# Altium PCB SteppperController.PcbDoc
Units mil, origin at the board's own origin, x right, y up, seen from the top; angles counter-clockwise.
Board outline 1653.54 x 1653.54 mil, 2 copper layers (Top Layer, Bottom Layer); 26 components, 24 nets, 90 pads, 34 vias.
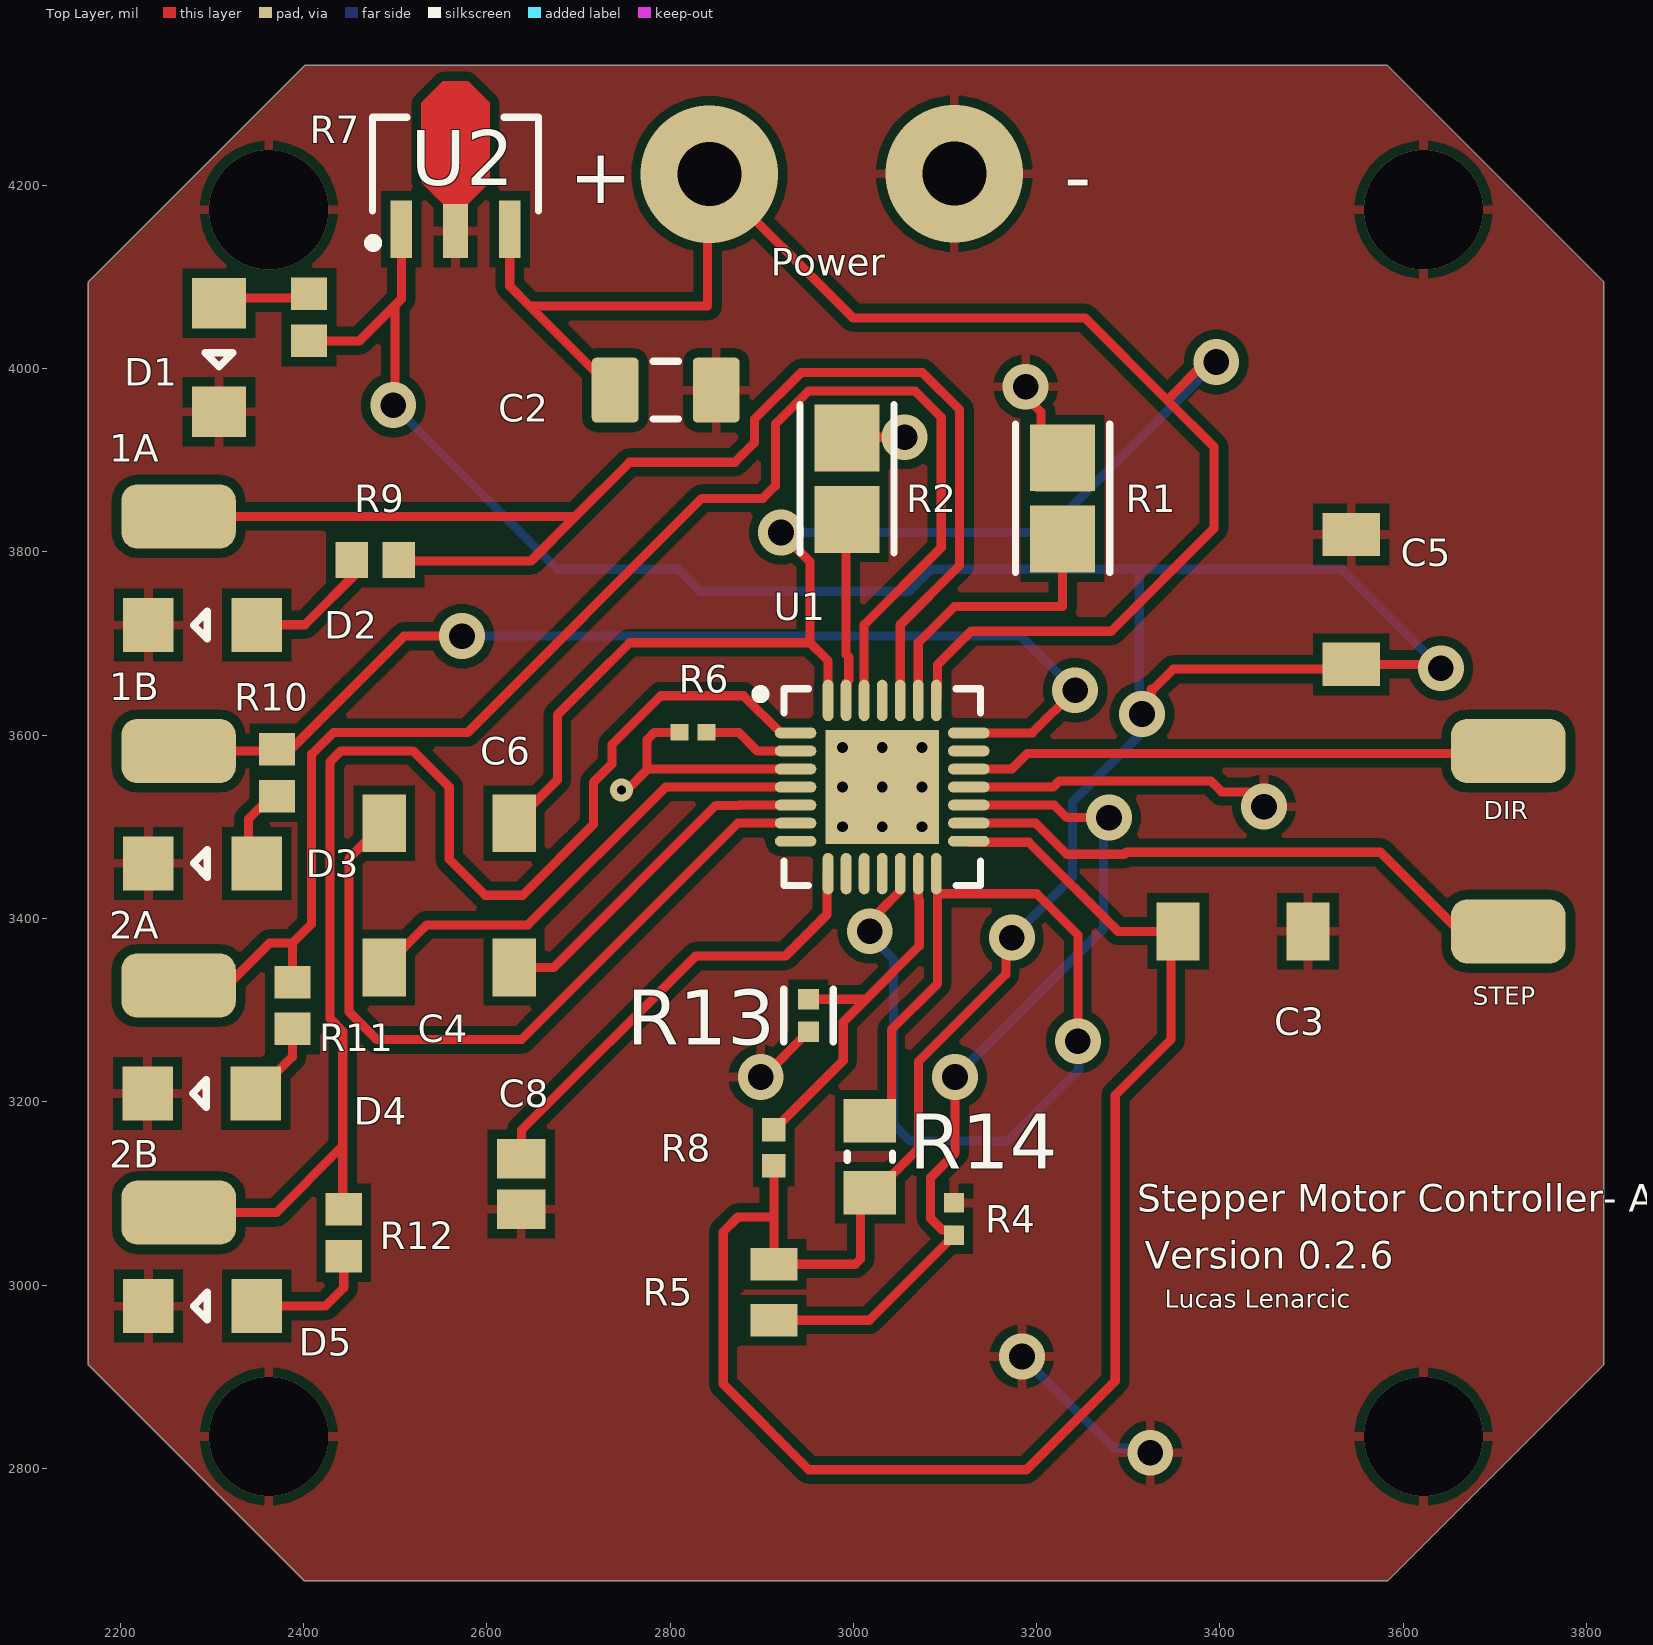
[diagram p0: Top Layer view]
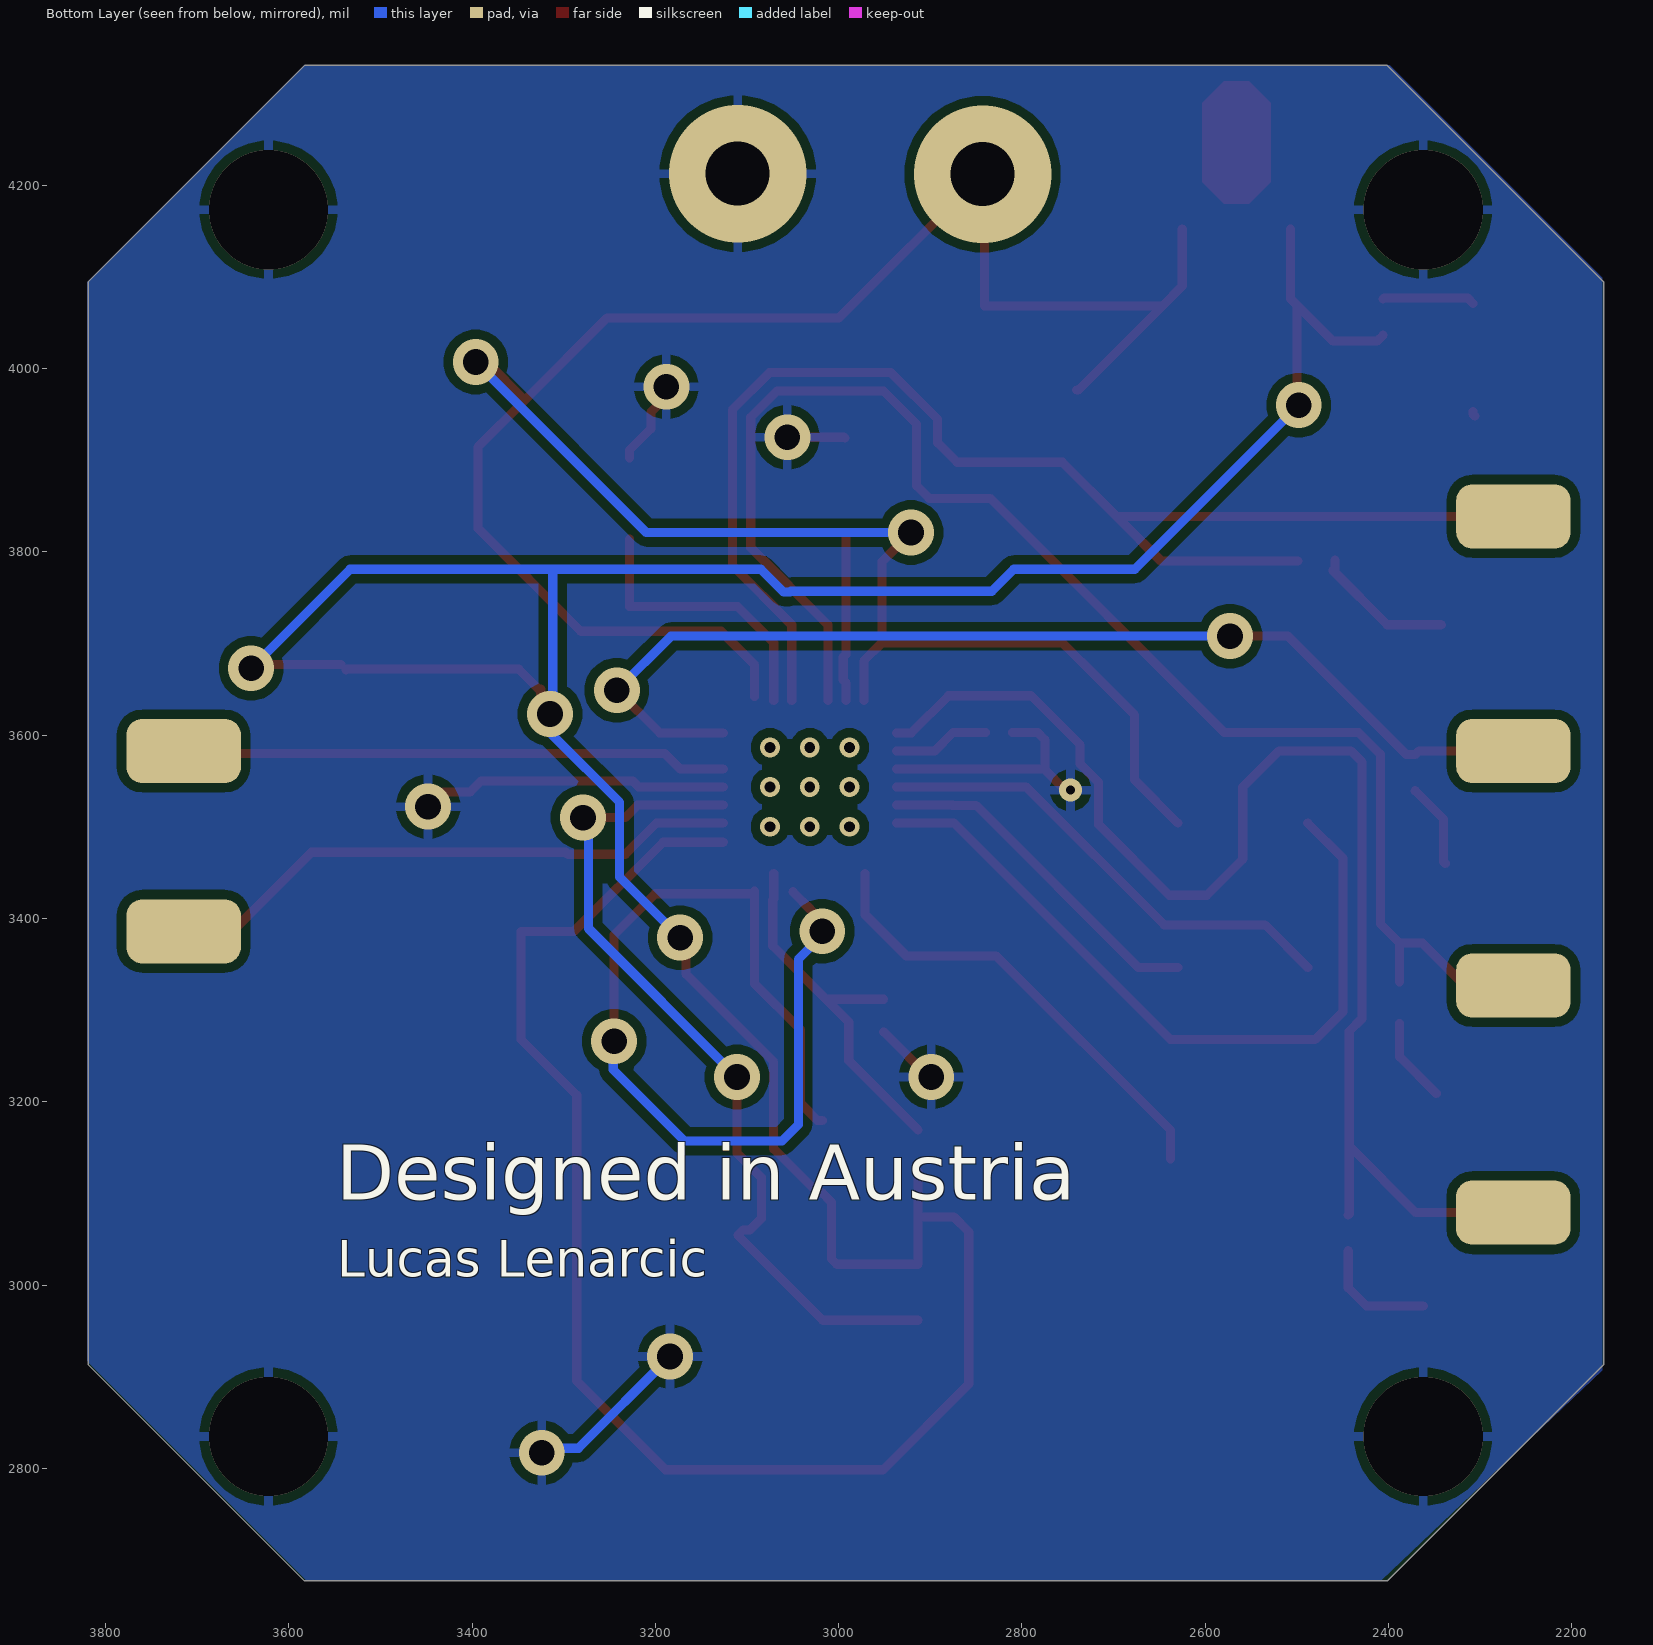
[diagram p1: Bottom Layer view, seen from below]
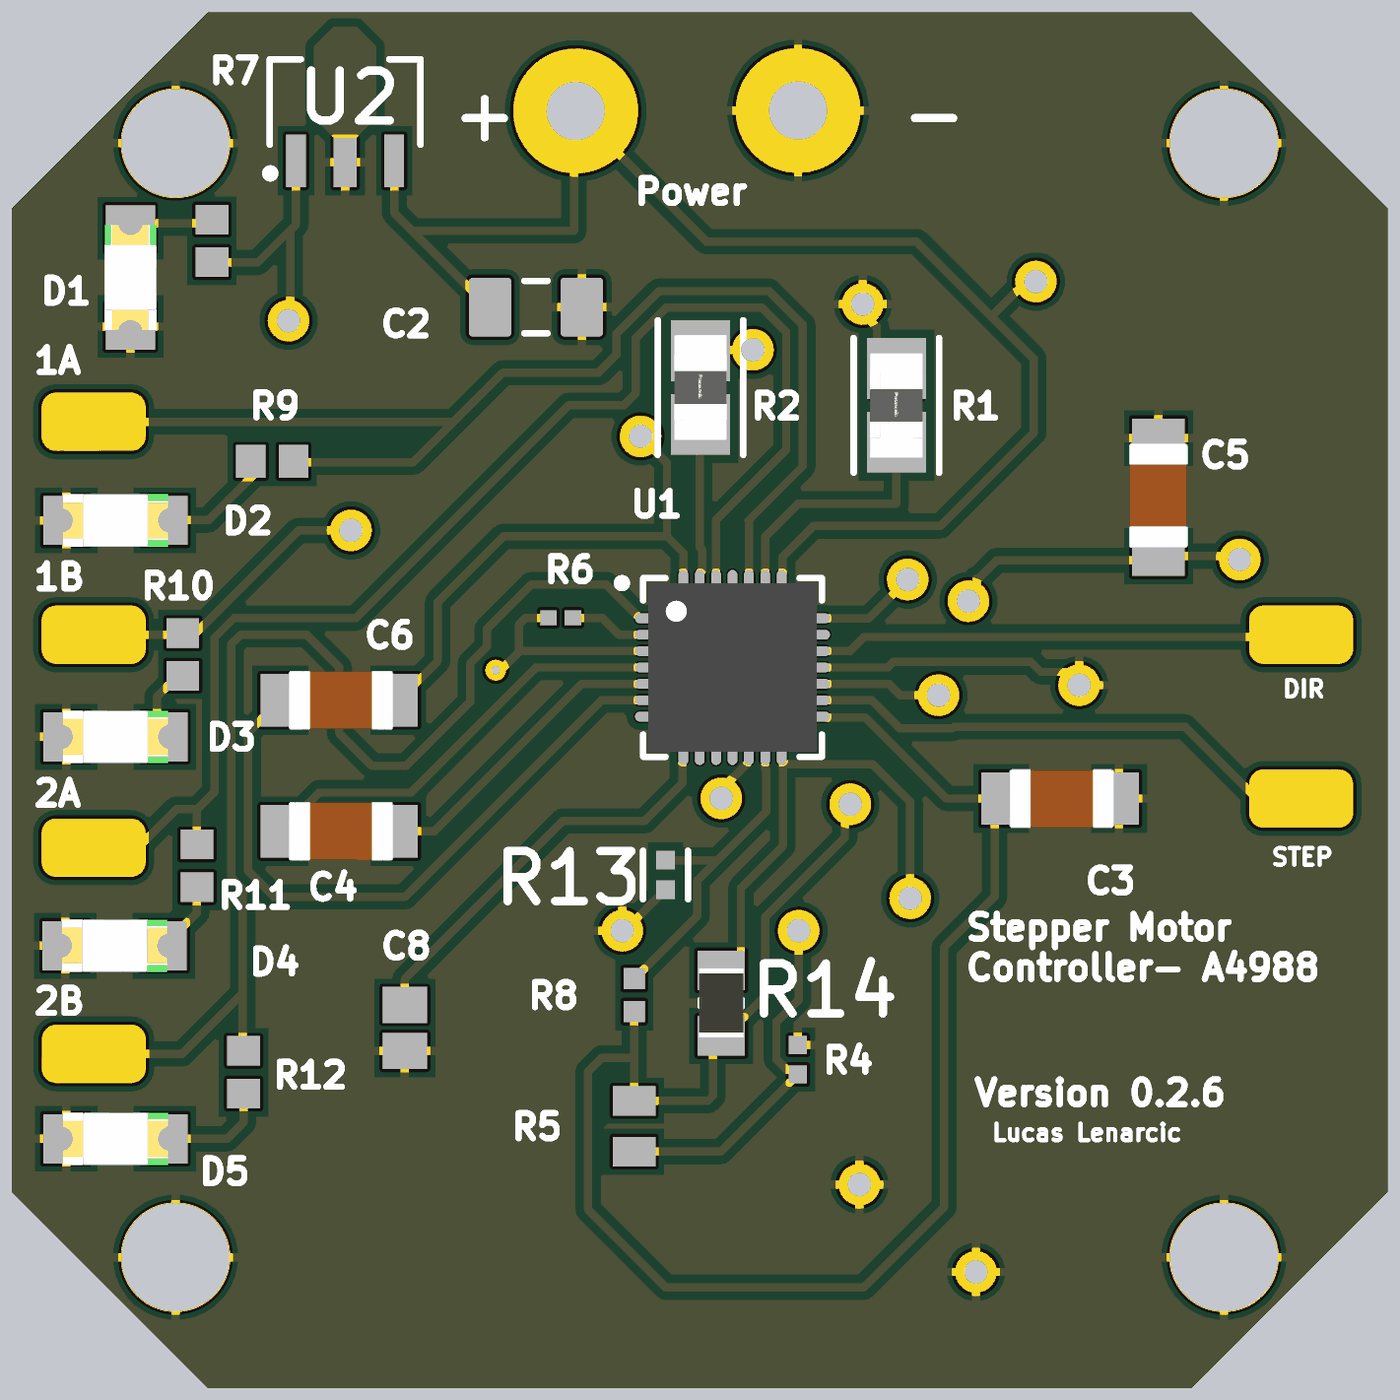
[diagram p2: 3D render of the assembled board from above, using the file's embedded part models]

## Layer stack, top to bottom
Top Solder: solder mask 0.4, Solder Resist, Dk 3.5
Top Layer: signal copper 1.4
Dielectric 1: dielectric 12.6, FR-4, Dk 4.8
Bottom Layer: signal copper 1.4
Bottom Solder: solder mask 0.4, Solder Resist, Dk 3.5

## Board outline
2401.57,4330.71 3582.68,4330.71 3818.9,4094.49 3818.9,2913.39 3582.68,2677.17 2401.57,2677.17 2165.35,2913.39 2165.35,4094.49

## Design rules (kind name [scope] priority, off if disabled: settings)
AssemblyTestPointUsage AssemblyTestPointUsage_1 [All] p2:
AssemblyTestpoint AssemblyTestpoint_1 [All] p2: testpointundercomponent=TRUE minsize=40 maxsize=100 preferedsize=60 minholesize=0 maxholesize=40 preferedholesize=32 testpointgrid=1 usegrid=TRUE gridtolerance=0.01 allowsidetop=TRUE allowsidebottom=TRUE
Clearance [All] p1: gap=10 ignorepadtopadclearanceinfootprint=FALSE except(0: Arc-Hole Track-Hole SMDPad-Hole THPad-Hole Via-Hole Fill-Hole Poly-Hole Region-Hole Text-Hole)
Clearance Clearance_1 [All] p2: gap=10 ignorepadtopadclearanceinfootprint=FALSE except(0: Arc-Hole Track-Hole SMDPad-Hole THPad-Hole Via-Hole Fill-Hole Poly-Hole Region-Hole Text-Hole)
ComponentClearance ComponentClearance_1 [All] p2: gap=10 collisioncheckmode=3 verticalgap=10 showdistances=FALSE
DiffPairsRouting DiffPairsRouting_1 [All] p2: maxlimit=10 minlimit=10 mostfreqgap=10 toplayer_minwidth=15 toplayer_maxwidth=15 toplayer_prefwidth=15 bottomlayer_minwidth=15 bottomlayer_maxwidth=15 bottomlayer_prefwidth=15 maxuncoupledlength=500
FabricationTestPointUsage FabricationTestPointUsage_1 [All] p2: valid=0 allowmultiple=FALSE
FabricationTestpoint FabricationTestpoint_1 [All] p2: side=3 testpointundercomponent=TRUE minsize=40 maxsize=100 preferedsize=60 minholesize=0 maxholesize=40 preferedholesize=32 testpointgrid=1 allowsidetop=TRUE allowsidebottom=TRUE usegrid=TRUE gridtolerance=0.01
FanoutControl Fanout_LCC [IsLCC] p1: bgadir=Out bgaviamode=Centered fanoutstyle=Auto fanoutdirection=Alternating viagrid=1 // Fanout_LCC (Default Rule)
FanoutControl Fanout_BGA [IsBGA] p2: bgadir=Out bgaviamode=Centered fanoutstyle=Auto fanoutdirection=Alternating viagrid=1 // Fanout_BGA (Default Rule)
FanoutControl Fanout_Default [All] p4: bgadir=Out bgaviamode=Centered fanoutstyle=Auto fanoutdirection=Alternating viagrid=1 // Fanout_Default (Default Rule)
FanoutControl Fanout_Small [(CompPinCount < 5)] p5: bgadir=Out bgaviamode=Centered fanoutstyle=Auto fanoutdirection=OutThenIn viagrid=1 // Fanout_Small (Default Rule)
FanoutControl Fanout_BGA_1 [IsBGA] p6: bgadir=Out bgaviamode=Centered fanoutstyle=Auto fanoutdirection=Alternating viagrid=1 // Fanout_BGA (Default Rule)
FanoutControl Fanout_LCC_1 [IsLCC] p7: bgadir=Out bgaviamode=Centered fanoutstyle=Auto fanoutdirection=Alternating viagrid=1 // Fanout_LCC (Default Rule)
FanoutControl Fanout_SOIC_1 [IsSOIC] p8: bgadir=Out bgaviamode=Centered fanoutstyle=Auto fanoutdirection=Alternating viagrid=1 // Fanout_SOIC (Default Rule)
FanoutControl Fanout_Small_1 [(CompPinCount < 5)] p9: bgadir=Out bgaviamode=Centered fanoutstyle=Auto fanoutdirection=OutThenIn viagrid=1 // Fanout_Small (Default Rule)
FanoutControl Fanout_Default_1 [All] p10: bgadir=Out bgaviamode=Centered fanoutstyle=Auto fanoutdirection=Alternating viagrid=1 // Fanout_Default (Default Rule)
Height Height_1 [All] p2: minheight=0 maxheight=1000 prefheight=500
HoleSize HoleSize_1 [All] p2: absolutevalues=TRUE maxlimit=100 minlimit=1 maxpercent=80.000 minpercent=20.000
HoleToHoleClearance HoleToHoleClearance_1 [All] p2: gap=10 allowstackedmicrovias=TRUE
LayerPairs LayerPairs_1 [All] p2: enforce=TRUE
MinimumSolderMaskSliver MinimumSolderMaskSliver_1 [All] p2: minsoldermaskwidth=10
NetAntennae NetAntennae_1 [All] p2: netantennaetolerance=0
PasteMaskExpansion PasteMaskExpansion_1 [All] p2: expansion=0
PlaneClearance PlaneClearance_1 [All] p2: clearance=20
PlaneConnect PlaneConnect_1 [All] p2: planeconnectstyle=Relief reliefexpansion=20 reliefentries=4 reliefconductorwidth=10 reliefairgap=10
PolygonConnect [All] p1: connectstyle=Relief reliefconductorwidth=10 reliefentries=4 polygonreliefangle="90 Angle" airgapwidth=10
PolygonConnect PolygonConnect_1 [All] p2: connectstyle=Relief reliefconductorwidth=10 reliefentries=4 polygonreliefangle="90 Angle" airgapwidth=10
RoutingCorners RoutingCorners_1 [All] p2: cornerstyle=45-Degree minsetback=100 maxsetback=100
RoutingLayers RoutingLayers_1 [All] p2: top layer_v5=TRUE bottom layer_v5=TRUE
RoutingPriority RoutingPriority_1 [All] p2: routingpriority=0
RoutingTopology RoutingTopology_1 [All] p2: topology=Shortest
RoutingVias [All] p1: holewidth=28 width=50 viastyle="Through Hole" minholewidth=28 minwidth=50 maxholewidth=28 maxwidth=50
RoutingVias RoutingVias_1 [All] p2: holewidth=28 width=50 viastyle="Through Hole" minholewidth=28 minwidth=50 maxholewidth=28 maxwidth=50
ShortCircuit ShortCircuit_1 [All] p2: allowed=FALSE
SilkToBoardRegionClearance SilkToBoardRegionClearance_1 [All] p2:
SilkToSilkClearance SilkToSilkClearance_1 [All] p2: silktosilkclearance=10
SilkToSolderMaskClearance SilkToSolderMaskClearance_1 [IsPad] p2: minsilkscreentomaskgap=10 clearancetoexposedcopper=TRUE
SolderMaskExpansion [All] p1: expansion=4 istentingtop=FALSE
SolderMaskExpansion SolderMaskExpansion_1 [All] p2: expansion=4 istentingtop=FALSE
UnRoutedNet UnRoutedNet_1 [All] p2:
UnpouredPolygon UnpouredPolygon_1 [All] p2:
Width [All] p1: maxlimit=10 minlimit=10 preferedwidth=10
Width Width_1 [All] p2: maxlimit=10 minlimit=10 preferedwidth=10
26 further rules are at their usual default settings.

## Components (designator, comment, footprint, x,y, rotation, side; value= is the part's Value field where it differs from the comment)
C2 "0.33uF" PCB-w610zufupuummbghd1in-1 2795.28,3976.38 r180 top
C3 "0.1uF" PCB-lcc7kuvv5qjd2xw4yurg-1 3425.2,3385.83 r180 top
C4 "0,1uF" PCB-lcc7kuvv5qjd2xw4yurg-1 2559.06,3346.46 r180 top
C5 "0.1uF" PCB-lcc7kuvv5qjd2xw4yurg-1 3543.31,3748.03 r270 top
C6 "0.1uF" PCB-lcc7kuvv5qjd2xw4yurg-1 2559.06,3503.94 r180 top
C8 "0.22uF" CAPC2013X140X50LL20T25 2637.8,3110.24 r90 top
D1 "Dialight 598-8210-107F" PCB-nfeeyiqhjphw6gveeqew-1 2308,4012 r270 top
D2 "Dialight 598-8210-107F" PCB-nfeeyiqhjphw6gveeqew-1 2290,3720 r180 top
D3 "Dialight 598-8210-107F" PCB-nfeeyiqhjphw6gveeqew-1 2290,3460 r180 top
D4 "Dialight 598-8210-107F" PCB-nfeeyiqhjphw6gveeqew-1 2289,3209 r180 top
D5 "Dialight 598-8210-107F" PCB-nfeeyiqhjphw6gveeqew-1 2290,2977 r180 top
R1 "ERJ8CWFR050V" FP-ERJ8CW-IPC_B 3228.35,3858.27 r270 top
R2 "ERJ8CWFR050V" FP-ERJ8CW-IPC_B 2993,3879.68 r270 top
R4 "ERJ-2RKF2401X" RESC1005X40X25NL05T05 3110,3072 r270 top
R5 "20k" RESC2013X55X40LL15T20 2913.39,2992.13 r90 top
R6 "100K" PCB-n97kkldbbf5rklmnt71m-1 2825,3603 r0 top
R7 "2.2k" RESC1608X55X30NL20T20 2406,4056 r270 top
R8 "1Ohm No short circuit" RESC1005X40X25ML05T05 2913.39,3149.61 r270 top
R9 "2.2k" RESC1608X55X30NL20T20 2478.31,3791 r0 top
R10 "2.2k" RESC1608X55X30NL20T20 2371,3559 r90 top
R11 "2.2k" RESC1608X55X30NL20T20 2388,3305 r90 top
R12 "2.2k" RESC1608X55X30NL20T20 2444,3057 r90 top
R13 "10k" FP-CRCW0402-e3-IPC_B 2951,3294 r90 top
R14 "100kOhm" RESC2013X60X35ML10T20 3018,3140 r270 top
U1 "A4988" ALEG-ET-28_V 3031.5,3543.31 r0 top
U2 "onsemi MC78L05ACHT1G" NXP-SOT89_A_M 2566,4217 r90 top

## Footprints (in the part's own frame and the unit in brackets; to place one, negate y for a bottom-side part, rotate by r counter-clockwise, add the part's x,y. Pads: shape width x height; smd on the part's side, far side on the other; paste and mask are expansions set on the pad)
ALEG-ET-28_V [mm] "QFN, 28-Leads, Body 5.15x5.15mm, Pitch 0.5mm, Thermal Pad 3.15x3.15mm"
  oval 1.15x0.3 smd mask+0.051: 1(-2.4,1.5) 2(-2.4,1) 3(-2.4,0.5) 4(-2.4,0) 5(-2.4,-0.5) 6(-2.4,-1) 7(-2.4,-1.5) 15(2.4,-1.5) 16(2.4,-1) 17(2.4,-0.5) 18(2.4,0) 19(2.4,0.5) 20(2.4,1) 21(2.4,1.5)
  oval 0.3x1.15 smd mask+0.051: 8(-1.5,-2.4) 9(-1,-2.4) 10(-0.5,-2.4) 11(0,-2.4) 12(0.5,-2.4) 13(1,-2.4) 14(1.5,-2.4) 22(1.5,2.4) 23(1,2.4) 24(0.5,2.4) 25(0,2.4) 26(-0.5,2.4) 27(-1,2.4) 28(-1.5,2.4)
  rect 3.15x3.15 smd mask+0.051: 29(0,0)
  silkscreen extent -3.5,-2.73 2.73,2.73, body extent -2.58,-2.58 2.58,2.58, height 1
CAPC2013X140X50LL20T25 [mm] "CAPC2013X140X50LL20T25"
  rect 1.1x1.35 smd: 1(-0.7,0) 2(0.7,0)
  body extent -1.1,-0.72 1.1,0.72, height 1.4
FP-CRCW0402-e3-IPC_B [mil]
  rect 22.37x22.54 smd paste+0 mask+0: 1(-17.8,0) 2(17.8,0)
  silkscreen extent -29,-27 29,27
FP-ERJ8CW-IPC_B [mil]
  rect 73.03x71.11 smd paste+0 mask+0: 1(-44.32,0) 2(44.32,0)
  silkscreen extent -81,-51 81,51, body extent -91,-45 91,45, height 10
NXP-SOT89_A_M [mm] "SOT89, 3-Leads, Body 4.6x2.6mm, Pitch 1.5mm, IPC Low Density"
  rect 1.6x0.6 smd: 1(-1.65,1.5) 3(-1.65,-1.5)
  rect 1.5x0.7 smd: 2(-1.7,0)
  Top Layer region: -0.95,0.35 -0.35,0.95 1.85,0.95 2.45,0.35 2.45,-0.35 1.85,-0.95 -0.35,-0.95 -0.95,-0.35
  silkscreen extent -2.16,-2.3 1.45,2.41, body extent -1.15,-2.3 1.45,2.3, height 1.6
PCB-lcc7kuvv5qjd2xw4yurg-1 [mm]
  rect 1.2x1.6 smd: 1(-1.8,0) 2(1.8,0)
  body extent -1.65,-0.9 1.55,0.9, height 1.55
PCB-n97kkldbbf5rklmnt71m-1 [mm] "RESC1005X37X25LL05T10"
  rect 0.5x0.45 smd: 1(-0.375,0) 2(0.375,0)
  body extent -0.53,-0.27 0.53,0.28, height 0.35
PCB-nfeeyiqhjphw6gveeqew-1 [mm]
  rect 1.4x1.5 smd: 1(-1.5,0) 2(1.5,0)
  silkscreen extent -0.13,-0.38 0.25,0.38, body extent -1.6,-0.8 1.6,0.8, height 0.68
PCB-w610zufupuummbghd1in-1 [mm]
  rrect20% 1.3x1.8 smd: 1(-1.4,0) 2(1.4,0)
  silkscreen extent -0.35,-0.8 0.35,0.8, body extent -1.7,-0.9 1.7,0.9, height 1.78
RESC1005X40X25ML05T05 [mm] "Chip Resistor, 2-Leads, Body 1.00x0.50mm, IPC Low Density"
  rect 0.65x0.65 smd: 1(-0.5,0) 2(0.5,0)
  body extent -0.53,-0.27 0.53,0.28, height 0.4
RESC1005X40X25NL05T05 [mm] "Chip Resistor, 2-Leads, Body 1.00x0.50mm, IPC Medium Density"
  rect 0.55x0.55 smd: 1(-0.45,0) 2(0.45,0)
  body extent -0.53,-0.27 0.53,0.28, height 0.4
RESC1608X55X30NL20T20 [mm] "RESC1608X55X30NL20T20"
  rect 0.9x1 smd: 1(-0.65,0) 2(0.65,0)
  body extent -0.9,-0.5 0.9,0.5, height 0.55
RESC2013X55X40LL15T20 [mm] "RESC2013X55X40LL15T20"
  rect 0.9x1.3 smd: 1(-0.775,0) 2(0.775,0)
  body extent -1.07,-0.7 1.07,0.7, height 0.55
RESC2013X60X35ML10T20 [mm] "Chip Resistor, 2-Leads, Body 2.1x1.35mm, IPC Low Density"
  rect 1.2x1.45 smd: 1(-1,0) 2(1,0)
  silkscreen extent -0.1,-0.63 0.1,0.63, body extent -1.05,-0.68 1.05,0.67, height 0.6

## Part data
C2: library part CMP-6acba34cbf0cb50c-1, "CL31 Series 0.33 uF 50 V ±10 % Tolerance X7R SMT Multilayer Ceramic Capacitor", Capacitance="330 nF", Capacitance Tolerance=±10%, Case/Package=1206, Dielectric Characteristic=X7R, Manufacturer Part Number=CL31B334KBFNNNE, Voltage Rating (DC)="50.0 V", Lead-Free Status="Lead Free", Mounting Style="Surface Mount", Octopart URL=https://octopart.com/cl31b334kbfnnne-samsung-9302177, OctopartID=6acba34cbf0cb50c, RoHS=Compliant
C3 C4 C5 C6: library part CMP-915a59dc44ec4e9d-4, "C Series 1206 0.1 uF 50 V ±5 % Tolerance C0G SMT Multilayer Ceramic Capacitor"
C8: library part CMP-3551434-4, "Multilayer Ceramic Capacitors MLCC - SMD/SMT 50volts .22uF 5% X7R 7inch reel", Capacitance="2.2e-07 F", Capacitance Tolerance=±5%, Case/Package=0805, Dielectric Characteristic=X7R, Manufacturer Part Number=08055C224JAT2A, Voltage Rating (DC)="50.0 V", Lead-Free Status="Lead Free", Mounting Style="Surface Mount", Number of Pins=2, Octopart URL=https://octopart.com/08055c224jat2a-avx+interconnect+%2F+elco-8665279, OctopartID=61bba8357c62be7c, RoHS=Compliant
D1 D2 D3 D4 D5: library part CMP-bfda76ddda44601d-2, "LED Uni-Color Red 2-Pin Chip 1206(3216Metric) T/R", Case/Package=1206, Case/Package (SI)=3216, Color=Red, Forward Voltage="2.00 V", Manufacturer Part Number=598-8210-107F, Operating Temperature="85.0 °C (max)", Lead-Free Status="Lead Free", Lens Color=Red, Lens Type=Non-Diffused, Luminous Intensity="80.0 mcd", Mounting Style="Surface Mount, Vertical", Number of Pins=2, Octopart URL=https://octopart.com/598-8210-107f-dialight-868600, OctopartID=bfda76ddda44601d, Packaging="Cut Tape (CT)", REACH SVHC Compliance="No SVHC", RoHS=Compliant, Size-Height="700 µm", Size-Length="3.20 mm", Size-Width="1.40 mm", Viewing Angle="140 °", Wavelength="635 nm, 640 nm"
R1 R2: library part CMP-2003-00803-2, "RES 0.05 OHM 1% 1W 1206", Case Code (Imperial)=1206, Case Code (Metric)=3216, Max Operating Temperature=125°C, Max Power Dissipation=1W, Min Operating Temperature=-55°C, Resistance=50mR, Resistor Type="Thick Film", Temperature Coefficient=75ppm/°C, Tolerance=1%, Case/Package=1206, Depth=1.6mm, Features="Automotive AEC-Q200", Height=0.03inch, Length=0.126inch, Mount="Surface Mount", Number of Terminations=2, Packaging="Cut Tape", Power Rating=1W, REACH SVHC="No SVHC", RoHS Compliant=Yes, Termination=SMD/SMT, Width=0.063inch
R4: library part CMP-2002-00798-1, Manufacturer=Panasonic, Part Number=ERJ-2RKF2401X
R5: library part CMP-15323555-2, Case/Package=0805, Manufacturer Part Number=TNPW080520K0BEEA, Power Rating="0.125 W", Resistance="20000.0 Ω", Resistance Tolerance=±0.1%, Voltage Rating (DC)="100.0 V", Lead-Free Status="Lead Free", Number of Pins=2, Octopart URL=https://octopart.com/tnpw080520k0beea-vishay-46507859, OctopartID=596b92a4db5e86ac, RoHS=Compliant
R6: library part CMP-86ed4a8b7141592a-1, "Res General Purpose Thick Film 0402 100k Ohm 1% 1/16W ±100ppm/°C Molded Paper T/R", Case/Package=0402, Manufacturer Part Number=CRGCQ0402F100K, Power Rating="63.0 mW", Resistance="100 kΩ", Resistance Tolerance=±1%, Temperature Coefficient="-100 ppm/°C to 100 ppm/°C", Voltage Rating (DC)="50.0 V", Lifecycle Status="Not Listed by Manufacturer", Octopart URL=https://octopart.com/crgcq0402f100k-te+connectivity-91017930, OctopartID=86ed4a8b7141592a, Packaging="Tape & Reel (TR)", RoHS=Compliant
R7 R9 R10 R11 R12: library part CMP-22beeaeef4a5fd79-1, "Res Thin Film 0603 10K Ohm 0.5% 1/16W ±25ppm/°C Molded SMD SMD Paper T/R", Case/Package=0603, Manufacturer Part Number=CPF0603D10KE, ELV Compliant=Compliant, Lifecycle Status=Active, Mounting Style="Surface Mount", Octopart URL=https://octopart.com/cpf0603d10ke-te+connectivity-22737789, OctopartID=22beeaeef4a5fd79, Packaging="Tape & Reel (TR)", RoHS=Compliant
R8: library part CMP-2002-08342-1, Manufacturer="Vishay Dale", Part Number=CRCW04021R00FKED
R13: library part CMP-2002-08135-2, "RES SMD 10K OHM 1% 1/16W 0402", Case Code (Imperial)=0402, Case Code (Metric)=1005, Max Operating Temperature=155°C, Max Power Dissipation=63mW, Min Operating Temperature=-55°C, Package Quantity=10, Resistance=10kR, Temperature Coefficient=100ppm/°C, Tolerance=1%, Voltage Rating=50V, Case/Package=0402, Composition="Thick Film", Contact Plating=Tin, Depth=0.5mm, Features="Automotive AEC-Q200", Height=0.35mm, Lead Free="Lead Free", Length=1mm, Military Standard=Not, Mount="Surface Mount", Number of Pins=2, Number of Terminations=2, Packaging="Tape and Reel", Power Rating=63mW, Radiation Hardening=No, Termination=SMD/SMT, Voltage Rating (DC)=50V, Weight=2.3E-05oz, Width=0.02inch
R14: library part CMP-2100-03668-1, "Chip Resistor, 100 KOhm, +/- 1%, 0.125 W, -55 to 155 degC, 0805 (2012 Metric), RoHS, Tape and Reel", Case Code (Imperial)=0805, Case Code (Metric)=2012, Manufacturer=Yageo, Max Operating Temperature=155degC, Max Power Dissipation=125mW, Min Operating Temperature=-55degC, Package Description="2-Pin Surface Mounted Device, Body 2 x 1.25 mm", Package Quantity=1, Resistance=100KOhm, Temperature Coefficient=100ppm/degreesC, Tolerance=1%, Voltage Rating=150V, Case/Package=0805, Composition=ThickFilm, Datasheet URL=http://www.yageo.com/NewPortal/yageodocoutput?fileName=/pdf/R-Chip/PYu-RC_Group_51_RoHS_L_5.pdf, Datasheet Version="Rev. 5, 10/2016", Depth=1.25mm, Height=0.024inch, Lead Free=LeadFree, Lead Pitch=0.4mm, Length=2mm, Manufacturer URL=http://www.yageo.com/, Military Standard=Not, Number of Pins=2, Number of Terminations=2, Package Reference=0805, Packaging=TapeandReel, Power Rating=125mW, REACH SVHC=Unknown, RoHSCompliant=true, Termination=SMD/SMT, Voltage Rating (DC)=150V, Width=0.049inch
U1: library part CMP-966506-24, "DMOS Microstepping Driver with Translator and Overcurrent Protection, 3 to 5.5 V, -20 to 85 degC, 28-Pin QFN (ET), RoHS, Tape and Reel"
U2: library part CMP-4fb3855e828b9074-8, "Linear Voltage Regulator, 100 mA, 5 to 24 V, Positive Vout: 5.0 V; TJ = 0°C to +125°C", Manufacturer Part Number=MC78L05ACHT1G, Operating Temperature="0.00 °C (min)", Output Current="100 mA", Lead-Free Status="Lead Free", Lifecycle Status=Active, Octopart URL=https://octopart.com/mc78l05acht1g-onsemi-65529950, OctopartID=4fb3855e828b9074, Packaging="Cut Tape (CT)", RoHS=Compliant

## Free pads (board coordinates)
  rrect50% 125x70 all layers, no hole: 6(2263.78,3326.77) 6(2263.78,3582.68) 6(2263.78,3838.58) 6(2264,3079) 6(3714.68,3385.83) 6(3714.68,3582.68)
  rect 60x60 smd: 7(2993,3840) 7(2994,3920) 7(3228,3816) 7(3229,3896)

## Via types
v1: diameter 50, hole 28, Top Layer to Bottom Layer, 18 vias
v2: diameter 21.65, hole 11.81, Top Layer to Bottom Layer, 9 vias
v3: diameter 130, hole 130, Top Layer to Bottom Layer, 4 vias
v4: diameter 150, hole 70, Top Layer to Bottom Layer, 2 vias
v5: diameter 25, hole 10, Top Layer to Bottom Layer, 1 vias

## Nets (pads, with @x,y where several pads share a name; then routed paths per layer and width w, separated by ;. In a path a pad name is that pad's centre, name@x,y a point inside that pad or via, vN(x,y) a via of type N, cw(c..) or ccw(c..) an arc to the next point about the centre after c; other vN are vias at no path point)
1A: pad.6@2263.78,3838.58 R9.2 U1.24 | length 1511.3
  Top Layer w10: pad.6@2263.78,3838.58 2696.85,3838.58 ; R9.2@2499,3790 2648.27,3790 2696.85,3838.58 ; U1.24 3051.18,3719.84 3050.87,3720.16 3116,3785.29 3116,3955 3075.49,3995.51 2942.95,3995.51 2892,3944.57 2892,3918.92 2870.72,3897.64 2755.91,3897.64 2696.85,3838.58
1B: pad.6@2263.78,3582.68 R10.2 U1.21 | length 1245.9
  Top Layer w10: pad.6@2312,3603 2263.78,3582.68 2367.01,3582.68 2371,3578.69 2380.94,3578.69 2380.94,3579.25 2509.7,3708 v1(2573,3708) ; U1.21 3195.36,3602.36 v1(3242,3649)
  Bottom Layer w10: v1(2573,3708) 3183,3708 v1(3242,3649)
2A: pad.6@2263.78,3326.77 R11.2 U1.26 | length 1646.9
  Top Layer w10: pad.6@2263.78,3326.77 2316.77,3326.77 2363,3373 2388,3373 ; R11.2 2388,3373 ; U1.26 3011.81,3720.47 3096,3804.66 3096,3946.72 3067.2,3975.51 2951.23,3975.51 2915,3939.28 2915,3872 2901.27,3858.27 2834.65,3858.27 2579.06,3602.68 2432.66,3602.68 2409,3579.02 2409,3394 2388,3373
2B: pad.6@2264,3079 R12.2 U1.1 | length 1515.7
  Top Layer w10: 2440.94,3149.61 2370.34,3079 pad.6@2264,3079 ; R12.2@2444,3076.69 2443,3077.69 2443,3276.75 2429,3290.75 2429,3570.73 2440.94,3582.68 2519.69,3582.68 2559.06,3543.31 2559.06,3464.57 2598.43,3425.2 2639.2,3425.2 2716.54,3502.54 2716.54,3548.43 2736.54,3568.43 2736.54,3589.54 2790,3643 2880,3643 2920.64,3602.36 U1.1 ; pad.6@2264,3079 2252.67,3079 2264,3090.33 pad.6@2264,3079
DIR: pad.6@3714.68,3582.68 U1.19 | length 622.3
  Top Layer w10: U1.19 3173,3562.99 3190.01,3580 3737.48,3580 pad.6@3740.16,3582.68
Ena: R6.2 U1.2 | length 105.7
  Top Layer w10: R6.2 2875,3603 2895.32,3582.68 U1.2
GND: C2.1 C3.1 C5.1 C8.1 D1.2 D2.2 D3.2 D4.2 D5.2 R1.1 R2.1 R4.1 R6.1 R13.1 U1.3 U1.18 U2.2 | length 1025.9
  Top Layer w10: D1.2@2306,3948 2308,3950 D1.2 ; v5(2747,3540) 2752.64,3540 2775.63,3562.99 ; R6.1 2783,3603 2775,3595 2775,3563.62 2775.63,3562.99 ; v1(2899,3227) 2901.72,3227 2950.92,3276.2 R13.1 ; U1.3 2775.63,3562.99 ; R2.1 2994,3925 v1(3056,3925) ; U1.18 3218.31,3543.31 3225,3550 3390,3550 3402,3538 3432,3538 v1(3448,3522) ; v1(3188,3980) 3188,3969.18 3204.9,3952.27 3204.9,3934.1 3228.35,3910.65 R1.1
  Bottom Layer w10: v1(3184,2922) 3284,2822 3319,2822 v1(3324,2817)
  other v3: 2362.2,2834.65 3622.05,2834.65 2362.2,4173.23 3622.05,4173.23
  other v4: 3110.24,4212.6
NetC4_1: C4.1 U1.5 | length 380.3
  Top Layer w10: C4.1 2673.23,3346.46 2850.08,3523.31 2875.98,3523.31 ; 2875.98,3523.62 U1.5
NetC4_2: C4.2 U1.4 | length 530.4
  Top Layer w10: C4.2 2534.69,3392.95 2644.92,3392.95 2795.28,3543.31 U1.4
NetC6_2: C6.2 U1.6 | length 819.5
  Top Layer w10: C6.2 2449.57,3465.31 2449.57,3298.46 2480.32,3267.72 2637.8,3267.72 2874.02,3503.94 U1.6
NetC8_2: C8.2 U1.8 | length 506.5
  Top Layer w10: C8.2 2637.8,3168.8 2828,3359 2925.93,3359 2971.22,3404.29 U1.8@2971.22,3448.82
NetD1_1: D1.1 R7.1 | length 101
  Top Layer w10: D1.1 2313.94,4077 2404.68,4077 R7.1@2406,4075.68
NetD2_1: D2.1 R9.1 | length 154.9
  Top Layer w10: D2.1@2342.52,3720.47 2401.57,3720.47 2460.63,3779.53 2458.63,3781.53 R9.1@2458.63,3791
NetD3_1: D3.1 R10.1 | length 92.9
  Top Layer w10: D3.1@2338.11,3460 2340,3461.89 2340,3508.32 R10.1@2371,3539.32
NetD4_1: D4.1 R11.1 | length 92.9
  Top Layer w10: D4.1 2388,3248.94 R11.1@2388,3285.32
NetD5_1: D5.1 R12.1 | length 130.4
  Top Layer w10: D5.1@2362.2,2977 2424,2977 2444,2997 R12.1 R12.1@2444,3037.32
NetR1_2: R1.2 U1.23 | length 310.6
  Top Layer w10: U1.23 3070.87,3700.79 3110.24,3740.16 3228.35,3740.16 R1.2
NetR2_2: R2.2 U1.27 | length 183.5
  Top Layer w10: U1.27 2992.13,3657.13 2995,3660 2995,3685.13 2992.13,3688 R2.2@2992.13,3818.9
NetR4_2: R4.2 R5.1 U1.17 | length 945.1
  Top Layer w10: R5.1 3017.33,2961.61 R4.2 3104.17,3060.11 3096.74,3060.11 3084.17,3072.68 3084.17,3117.17 3111,3144 v1(3111,3227) ; U1.17 3219.38,3523.62 3233,3510 v1(3279,3510)
  Bottom Layer w10: v1(3111,3227) 3273,3389 3273,3504 v1(3279,3510)
NetR14_1: R14.1 U1.14 | length 393.3
  Top Layer w10: R14.1 3022.92,3179.37 3041.54,3197.99 3041.54,3278.54 3092,3329 3092,3429.77 3094.91,3426.86 3200.14,3426.86
ROSC: R8.1 R13.2 U1.13 | length 408.5
  Top Layer w10: R8.1 2989,3244.91 2989,3287 3013.8,3311.8 ; R13.2 3013.8,3311.8 ; U1.13 3070.87,3421.42 3072,3420.28 3072,3370 3013.8,3311.8
STEP: pad.6@3714.68,3385.83 U1.16 | length 664.9
  Top Layer w10: U1.16 3198.93,3503.94 3232.87,3470 3295.57,3470 3297.69,3472.12 3575.12,3472.12 3661.42,3385.83 pad.6@3740.16,3385.83
VDD: C3.2 C5.2 R5.2 R7.2 R8.2 R14.2 U1.15 U2.1 | length 4533.6
  Top Layer w10: R7.2@2406,4036.31 2412.31,4030 2461,4030 2499.9,4068.9 2500,4068.9 ; v1(2498,3960) 2500,3962 2500,4068.9 ; U2.1 2506.94,4075.84 2500,4068.9 ; R8.2@2913.39,3124.02 2913.39,3074.39 2913.19,3074.19 ; U1.15@3125.98,3483.03 3191.56,3483.03 3288.76,3385.83 3346.46,3385.83 3346.46,3267.72 3285.79,3207.05 3285.79,2895.31 3188.98,2798.5 2951.5,2798.5 2858,2892 2858,3058 2874.19,3074.19 2913.19,3074.19 ; v1(3173,3379) 3166.43,3372.43 3166.43,3339 3071,3243.57 3071,3148.71 3022.92,3100.63 R14.2 3008,3090.63 3008,3028.5 3002.14,3022.64 R5.2 2913.39,3074 2913.19,3074.19 ; v1@3318.9,3622.05 3325,3628.15 3325,3650.07 3327.07,3650.07 3349,3672 3536.66,3672 C5.2@3537.4,3671.26 ; C5.2 3636.83,3677.17 v1(3641,3673)
  Bottom Layer w10: v1(2498,3960) 2677,3781 2809,3781 2833,3757 3052,3757 3053,3756 3060,3756 3085,3781 3312,3781 ; v1(3173,3379) 3239,3445 3239,3526.57 3312,3599.57 3312,3781 ; v1(3641,3673) 3533,3781 3312,3781
  other v1: 3315,3623
Vin: C2.2 C6.1 U1.22 U1.28 U2.3 | length 2979.2
  Top Layer w10: U2.3 2625.06,4089.94 2647,4068 ; C6.1 2677.06,3551.07 2677.06,3621.94 2716.54,3661.42 2755.91,3700.79 2952.76,3700.79 ; C2.2 2738.62,3976.38 2647,4068 ; v4@2841,4195 2841,4068 2647,4068 ; v4(2843,4212) 2999.88,4055.12 3252.88,4055.12 3342.5,3965.5 ; v1(2921,3821) 2952.76,3789.24 2952.76,3700.79 ; U1.28 2972.44,3681.1 2952.76,3700.79 ; U1.22@3091.77,3642 3091.77,3676.77 3128.35,3713.35 3281.35,3713.35 3393.5,3825.5 3393.5,3914.5 3342.5,3965.5 ; v1(3396,4007) 3384,4007 3342.5,3965.5
  Bottom Layer w10: v1(2921,3821) 3210,3821 v1(3396,4007)
pads on no net: U1.7 U1.9 U1.10 U1.11 U1.12 U1.20 U1.25 U1.29
copper on no net: | length 725.1
  Top Layer w10: v1(3018,3386) 3018,3396.82 3030.78,3409.61 3030.78,3409.78 3050,3429 ; 3048.35,3917.35 3056,3925 ; 3200.14,3426.86 3245,3382 v1(3245,3266)
  Bottom Layer w10: v1(3018,3386) 3018,3388 3018,3381.43 3044,3355.43 3044,3175 3062,3157 3130,3157 3168,3157 3246,3235 v1@3246,3246
  other v2: 2988.19,3500 3031.5,3500 3074.8,3500 2988.19,3543.31 3031.5,3543.31 3074.8,3543.31 2988.19,3586.61 3031.5,3586.61 3074.8,3586.61

## Polygon pours and split planes (outlines as drawn)
no net on Multi-Layer (solid): 2401.57,4330.71 3582.68,4330.71 3818.9,4094.49 3818.9,2913.39 3582.68,2677.17 2401.57,2677.17 2165.35,2913.39 2165.35,4094.49
GND on Bottom Layer "GND_L02_P001" (solid, pour order 1): 2408,2678 3581,2678 3820,2917 3820,4094 3583,4331 2399,4331 2167,4099 2167,2907
GND on Top Layer "GND_L01_P000" (solid, pour order 0): 3583,2677 3819,2913 3819,4094 3582,4331 2403,4331 2164,4092 2164,2913 2400,2677

## Silkscreen, mask and mechanical layers (free items; w line width, h text height)
Top Overlay:
  text "+" at 2690,4180 h60
  text "-" at 3230,4180.01 h60
  text "Power" at 2910,4101 h30
  text "1A" at 2188,3898 h30
  text "1B" at 2188,3638 h30
  text "DIR" at 3688,3508 h20
  text "2A" at 2188,3378 h30
  text "STEP" at 3676,3306 h20
  text "2B" at 2188,3128 h30
  text "Stepper Motor Controller- A4988" at 3310,3080 h30
  text "Version 0.2.6" at 3318,3018 h30
  text "Lucas Lenarcic" at 3340,2975 h20
Bottom Overlay:
  text "Designed in Austria" at 3548,3092.99 h60
  text "Lucas Lenarcic" at 3547,3009 h40
Outline:
  lines w47.24: 2141.73,2913.39 ccw(c2165.35,2913.39) 2148.65,2896.68 ; 2141.73,2913.39 ccw(c2165.35,2913.39) 2148.65,2896.68 ; 2141.73,2913.39 2141.73,4094.49 ; 2141.73,4094.49 cw(c2165.35,4094.49) 2148.65,4111.19 ; 2141.73,4094.49 cw(c2165.35,4094.49) 2148.65,4111.19 ; 2148.65,2896.68 2384.87,2660.46 ; 2148.65,4111.19 2384.87,4347.41 ; 2384.87,2660.46 ccw(c2401.57,2677.17) 2401.57,2653.54 ; 2384.87,2660.46 ccw(c2401.57,2677.17) 2401.57,2653.54 ; 2384.87,4347.41 cw(c2401.57,4330.71) 2401.57,4354.33 ; 2384.87,4347.41 cw(c2401.57,4330.71) 2401.57,4354.33 ; 2401.57,2653.54 3582.68,2653.54 ; 2401.57,4354.33 3582.68,4354.33 ; 3582.68,2653.54 ccw(c3582.68,2677.17) 3599.38,2660.46 ; 3582.68,2653.54 ccw(c3582.68,2677.17) 3599.38,2660.46 ; 3582.68,4354.33 cw(c3582.68,4330.71) 3599.38,4347.41 ; 3582.68,4354.33 cw(c3582.68,4330.71) 3599.38,4347.41 ; 3599.38,2660.46 3835.6,2896.68 ; 3599.38,4347.41 3835.6,4111.19 ; 3835.6,2896.68 ccw(c3818.9,2913.39) 3842.52,2913.39 ; 3835.6,2896.68 ccw(c3818.9,2913.39) 3842.52,2913.39 ; 3835.6,4111.19 cw(c3818.9,4094.49) 3842.52,4094.49 ; 3835.6,4111.19 cw(c3818.9,4094.49) 3842.52,4094.49 ; 3842.52,2913.39 3842.52,4094.49